# Altium PCB Copy of PCB1.PcbDoc
Units mm, origin at the board's own origin, x right, y up, seen from the top; angles counter-clockwise.
Board outline 91.9 x 76.4 mm, 2 copper layers (Top Layer, Bottom Layer), stack 0.211 mm thick; 44 components, 65 nets, 251 pads, 110 vias.
Unrouted connection lines stored in the file: 3.
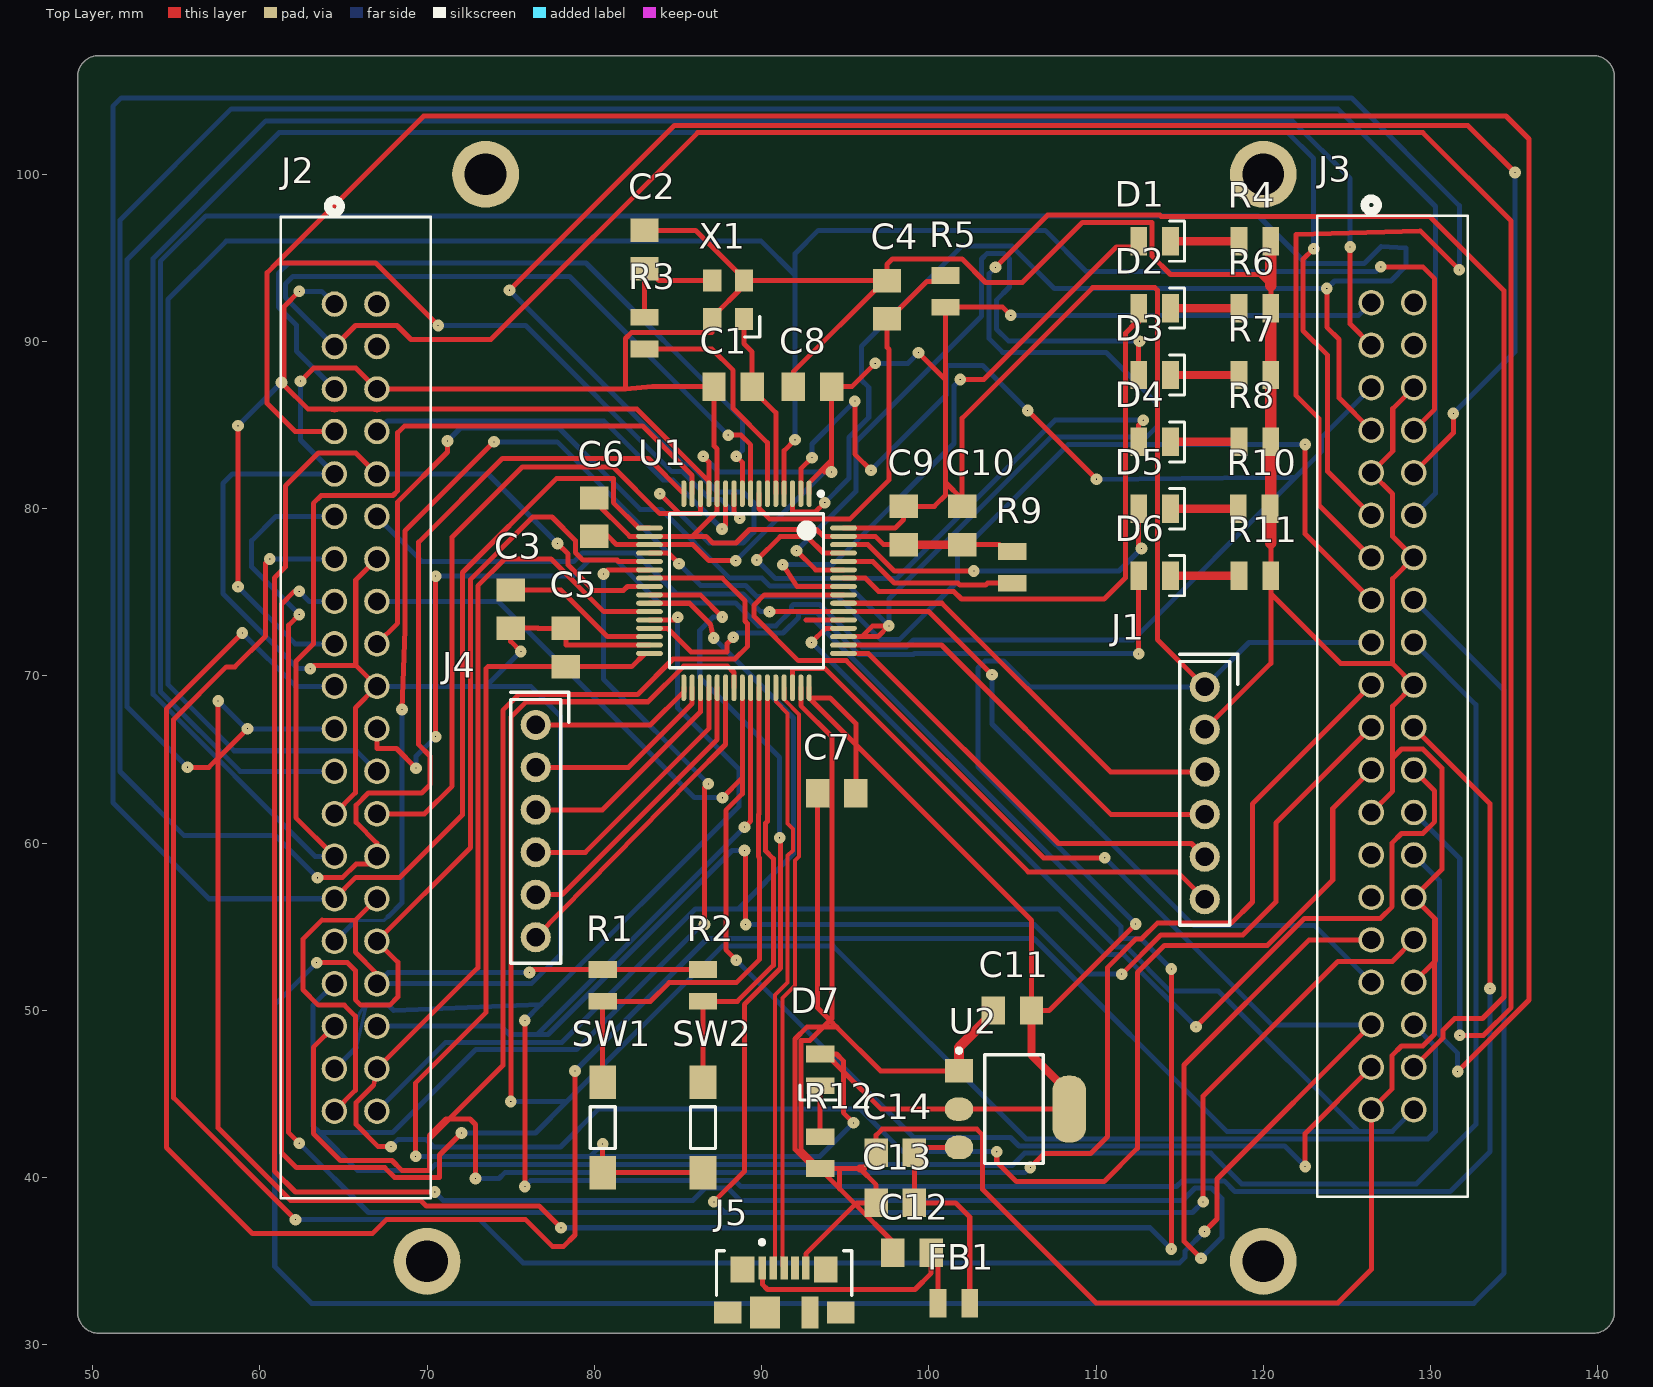
[diagram p0: Top Layer view]
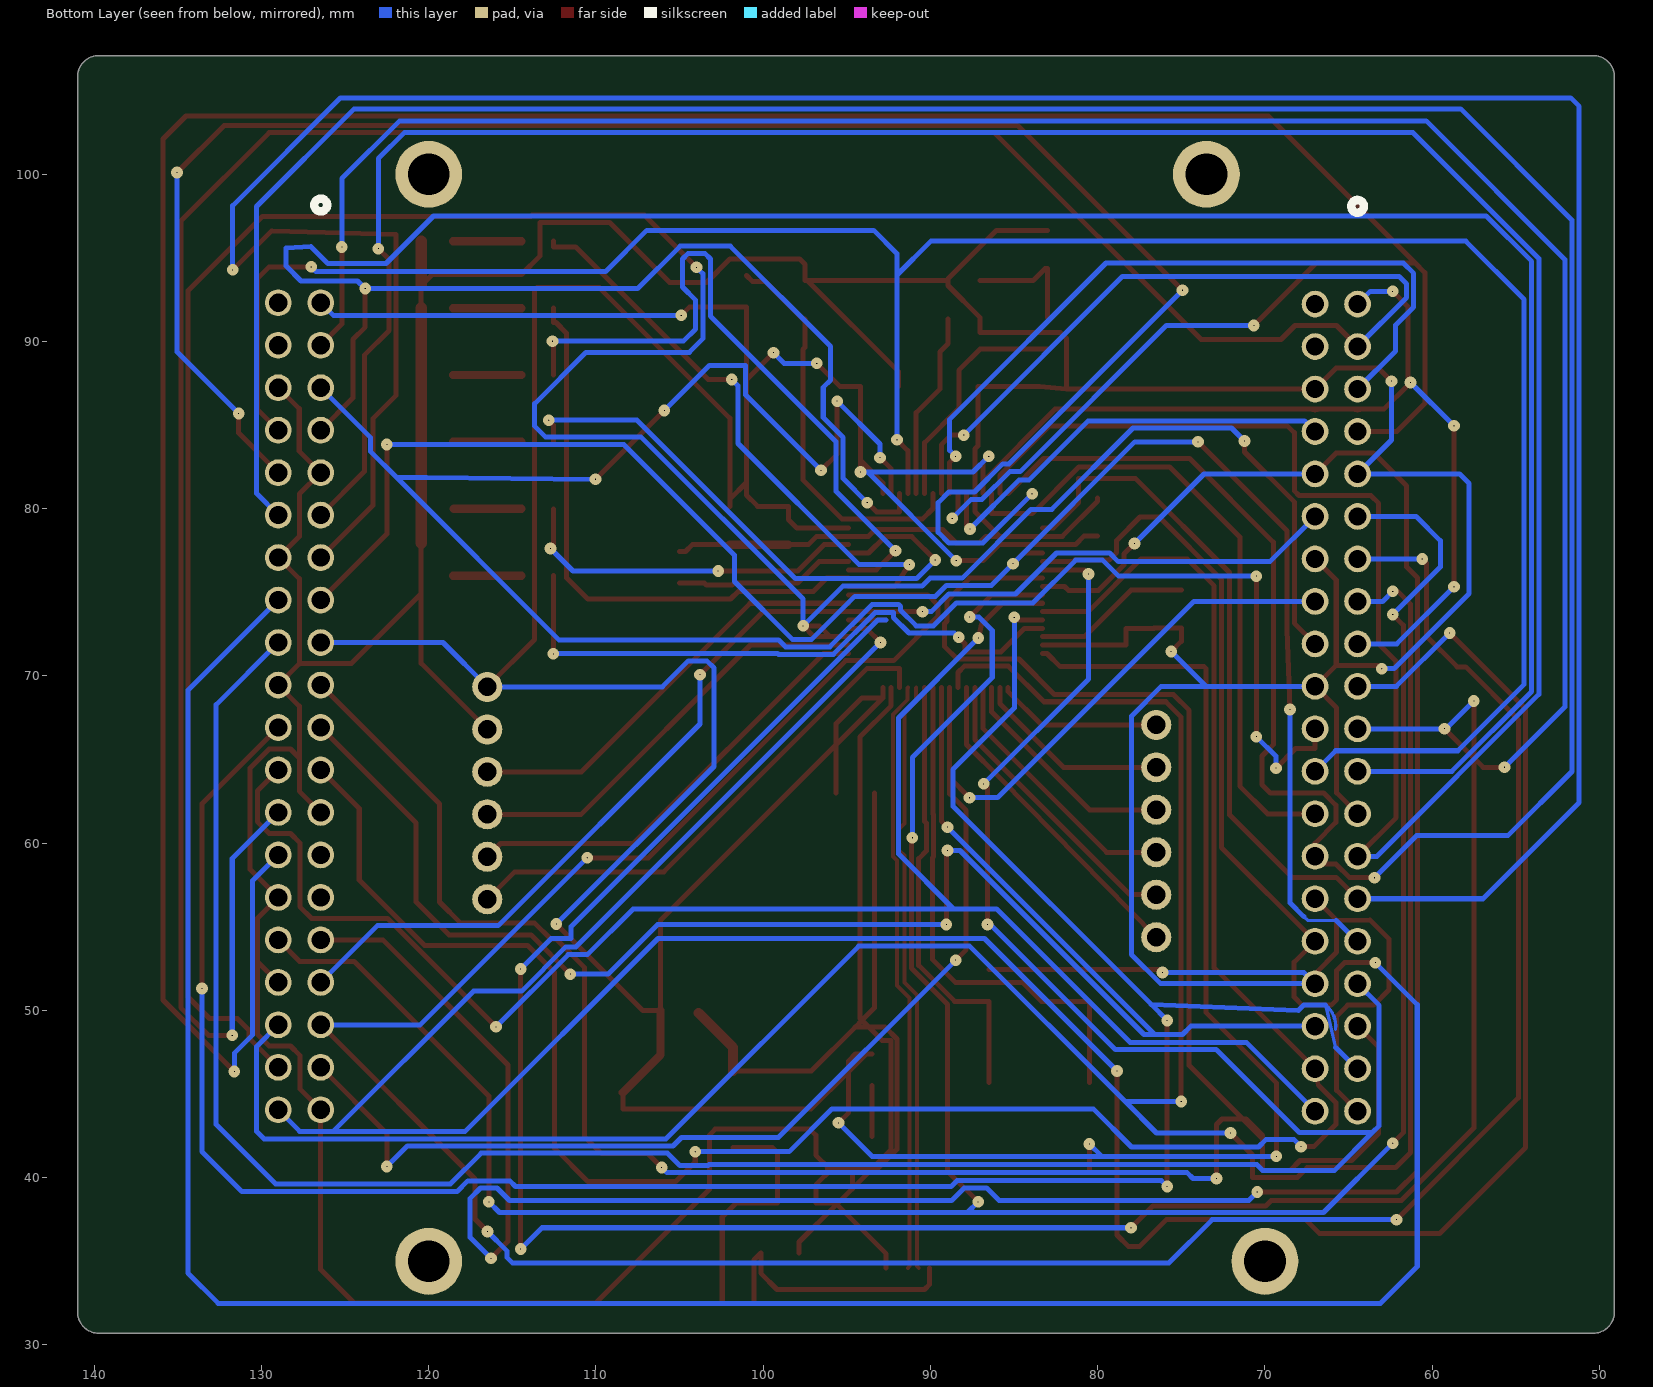
[diagram p1: Bottom Layer view, seen from below]

## Layer stack, top to bottom
Top Solder: solder mask 0.0102, Solder Resist, Dk 3.5
Top Layer: signal copper 0.0356
Dielectric 1: core 0.1397, Core-017, Dk 4.1
Bottom Layer: signal copper 0.0356
Bottom Solder: solder mask 0.0102, Solder Resist, Dk 3.5

## Board outline
49.1,31.97 49.1,105.83 cw(c50.37,105.83) 50.37,107.1 139.73,107.1 cw(c139.73,105.83) 141,105.83 141,31.97 cw(c139.73,31.97) 139.73,30.7 50.37,30.7 cw(c50.37,31.97)

## Design rules (kind name [scope] priority, off if disabled: settings)
Clearance [All] p1: gap=0.254 ignorepadtopadclearanceinfootprint=FALSE except(0: Arc-Hole Track-Hole SMDPad-Hole THPad-Hole Via-Hole Fill-Hole Poly-Hole Region-Hole Text-Hole; 0.127: Arc-Arc Arc-Track Arc-SMDPad Track-Track Track-SMDPad SMDPad-SMDPad; 0.33: Arc-THPad Arc-Via Track-THPad Track-Via SMDPad-THPad SMDPad-Via THPad-Via Via-Via; 0.5: THPad-THPad)
DiffPairsRouting [All] p1: maxlimit=0.2 minlimit=0.2 mostfreqgap=0.2 toplayer_minwidth=0.235 toplayer_maxwidth=0.235 toplayer_prefwidth=0.235 bottomlayer_minwidth=0.235 bottomlayer_maxwidth=0.235 bottomlayer_prefwidth=0.235 impedanceprofiledriven=TRUE impedanceprofileid={3DAFF3E0-E45B-4C19-A753-60FD53768F31} impedanceprofilevalue=90.000000 maxuncoupledlength=12.7
HoleSize [IsVia] p1: absolutevalues=TRUE maxlimit=2.54 minlimit=0 maxpercent=80.000 minpercent=20.000
PolygonConnect [All] p1: connectstyle=Direct reliefconductorwidth=0.254 reliefentries=4 polygonreliefangle="90 Angle" airgapwidth=0.254
RoutingVias [All] p1: holewidth=0 width=0.7 viastyle="Through Hole" minholewidth=0 minwidth=0.55 maxholewidth=0.4 maxwidth=0.9
SolderMaskExpansion [All] p1: expansion=0.102 istentingtop=FALSE
UnRoutedNet [All] p1: checkbadconnections=TRUE
Width [All] p1: maxlimit=1 minlimit=0.13 preferedwidth=0.3 minimp=50.000000 maximp=50.000000 favimp=50.000000
27 further rules are at their usual default settings.

## Classes and differential pairs
differential pair USB_D: +USB_D_P -USB_D_N

## Components (designator, comment, footprint, x,y, rotation, side; value= is the part's Value field where it differs from the comment)
C1 "28pF" CAP_0805 88.3,87.3 r180 top
C2 "28pF" CAP_0805 83,95.5 r90 top
C3 "2.2uF" CAP_0805 75,74 r90 top
C4 "100nF" CAP_0805 97.5,92.5 r270 top
C5 "100nF" CAP_0805 78.3,71.7 r270 top
C6 "100nF" CAP_0805 80,79.5 r270 top
C7 "100nF" CAP_0805 94.5,63 r0 top
C8 "100nF" CAP_0805 93.043,87.3 r0 top
C9 "100nF" CAP_0805 98.5,79 r90 top
C10 "2.2uF" CAP_0805 102,79 r90 top
C11 "22uF" CAP_0805 105,50 r0 top
C12 "2.2uF" CAP_0805 99,35.5 r0 top
C13 "2.2uF" CAP_0805 98,38.5 r0 top
C14 "22uF" CAP_0805 98,41.5 r0 top
D1 "GREEN" LED_0805_GREEN 113.5,96 r180 top
D2 "GREEN" LED_0805_GREEN 113.5,92 r180 top
D3 "GREEN" LED_0805_GREEN 113.5,88 r180 top
D4 "GREEN" LED_0805_GREEN 113.5,84 r180 top
D5 "GREEN" LED_0805_GREEN 113.5,80 r180 top
D6 "GREEN" LED_0805_GREEN 113.5,76 r180 top
D7 "GREEN" LED_0805_GREEN 93.5,46.45 r90 top
FB1 "120R" FB_0805 101.5,32.5 r0 top
J1 "G800W302018EU" G800W302018EU 116.5,63 r0 top
J2 "BUFFER_LOW" CONN_3020-40-0100-00_CNC 64.46,92.24 r270 top
J3 "BUFFER_HIGH" CONN_3020-40-0100-00_CNC 126.46,92.32 r270 top
J4 "G800W302018EU" G800W302018EU 76.5,60.73 r0 top
J5 "473460001" FP-473460001-MFG 91.35,32.29 r0 top
R1 "10k" RES_0805 80.5,51.5 r270 top
R2 "10k" RES_0805 86.5,51.5 r270 top
R3 "0R" RES_0805 83,90.5 r90 top
R4 "1k" RES_0805 119.5,96 r180 top
R5 "10k" RES_0805 101,93 r270 top
R6 "1k" RES_0805 119.5,92 r180 top
R7 "1k" RES_0805 119.5,88 r180 top
R8 "1k" RES_0805 119.5,84 r180 top
R9 "10k" RES_0805 105,76.5 r270 top
R10 "1k" RES_0805 119.45,80 r180 top
R11 "1k" RES_0805 119.5,76 r180 top
R12 "1k" RES_0805 93.5,41.5 r90 top
SW1 "DTSM-3" DTSM-3 80.5,43 r270 top
SW2 "DTSM-3" DTSM-3 86.5,43 r270 top
U1 "STM32F401RBT6TR" STM-LQFP64_L 89.1,75.1 r270 top
U2 "AMS1117-3.3" FP-AMS1117-IPC_C 105.1,44.1 r0 top
X1 "24MHz" XTAL_3225 88,92.5 r90 top

## Footprints (in the part's own frame and the unit in brackets; to place one, negate y for a bottom-side part, rotate by r counter-clockwise, add the part's x,y. Pads: shape width x height; smd on the part's side, far side on the other; paste and mask are expansions set on the pad)
CAP_0805 [mm]
  rect 1.4x1.7 smd: 1(-1.143,0) 2(1.143,0)
  body extent -1.15,-0.76 1.15,0.79, height 1.01
CONN_3020-40-0100-00_CNC [mil]
  round 60 / inner round 60 / far side round 63 hole 43 paste-31.5 mask-31.5: 1(0,0) 2(0,100) 3(100,0) 4(100,100) 5(200,0) 6(200,100) 7(300,0) 8(300,100) 9(400,0) 10(400,100) 11(500,0) 12(500,100) 13(600,0) 14(600,100) 15(700,0) 16(700,100) 17(800,0) 18(800,100) 19(900,0) 20(900,100) 21(1000,0) 22(1000,100) 23(1100,0) 24(1100,100) 25(1200,0) 26(1200,100) 27(1300,0) 28(1300,100) 29(1400,0) 30(1400,100) 31(1500,0) 32(1500,100) 33(1600,0) 34(1600,100) 35(1700,0) 36(1700,100) 37(1800,0) 38(1800,100) 39(1900,0) 40(1900,100)
  silkscreen extent -245,-127 2105,227
DTSM-3 [mm]
  rect 2x1.6 smd: 1(-2.7,0) 2(2.7,0)
  silkscreen extent -1.25,-0.75 1.25,0.75, body extent -3.6,-1.75 3.6,1.75, height 4.96
FB_0805 [mm]
  rect 1x1.7 smd: 1(-0.95,0) 2(0.95,0)
  body extent -1,-0.63 1,0.63, height 0.86
FP-473460001-MFG [mm]
  rect 0.45x1.38 smd paste+0 mask+0: 1(-1.3,2.31) 2(-0.65,2.31) 3(0,2.31) 4(0.65,2.31) 5(1.3,2.31)
  rect 1.425x1.55 smd paste+0 mask+0: 6(-2.487,2.225) 7(2.488,2.225)
  rect 1.65x1.3 smd paste+0 mask+0: 8(-3.375,-0.35) 11(3.375,-0.35)
  rect 1.8x1.9 smd paste+0 mask+0: 9(-1.15,-0.35)
  rect 1x1.9 smd paste+0 mask+0: 10(1.55,-0.35)
  silkscreen extent -4.05,0.67 4.04,3.97, body extent -4.3,-2.48 4.3,3.45, height 0.25
FP-AMS1117-IPC_C [mm]
  rect 1.7x1.4 smd paste+0 mask+0: 1(-3.295,2.29)
  rrect100% 1.7x1.4 smd paste+0 mask+0: 2(-3.295,0) 3(-3.295,-2.29)
  rrect87% 2.004x4 smd paste+0 mask+0: 4(3.295,0)
  silkscreen extent -3.42,-3.25 1.75,3.62, body extent -3.9,-3.35 3.9,3.35, height 0.25
G800W302018EU [mm]
  round 1.8 hole 1.1 mask+0.07: 1(0,6.35) 2(0,3.81) 3(0,1.27) 4(0,-1.27) 5(0,-3.81) 6(0,-6.35)
  silkscreen extent -1.5,-7.9 1.97,8.3, body extent -1.25,-7.62 1.25,7.62, height 8.61
LED_0805_GREEN [mm]
  rect 1x1.7 smd: A(0.95,0) K(-0.95,0)
  silkscreen extent -1.8,-1.2 -0.9,1.2, body extent -1,-0.63 1,0.63, height 1.12
RES_0805 [mm]
  rect 1x1.7 smd: 1(-0.95,0) 2(0.95,0)
  body extent -1,-0.63 1,0.63, height 0.47
STM-LQFP64_L [mm] "QFP, 64-Leads, Body 10x10mm, Pitch 0.5mm, IPC High Density"
  oval 1.6x0.3 smd: 1(-5.8,3.75) 2(-5.8,3.25) 3(-5.8,2.75) 4(-5.8,2.25) 5(-5.8,1.75) 6(-5.8,1.25) 7(-5.8,0.75) 8(-5.8,0.25) 9(-5.8,-0.25) 10(-5.8,-0.75) 11(-5.8,-1.25) 12(-5.8,-1.75) 13(-5.8,-2.25) 14(-5.8,-2.75) 15(-5.8,-3.25) 16(-5.8,-3.75) 33(5.8,-3.75) 34(5.8,-3.25) 35(5.8,-2.75) 36(5.8,-2.25) 37(5.8,-1.75) 38(5.8,-1.25) 39(5.8,-0.75) 40(5.8,-0.25) 41(5.8,0.25) 42(5.8,0.75) 43(5.8,1.25) 44(5.8,1.75) 45(5.8,2.25) 46(5.8,2.75) 47(5.8,3.25) 48(5.8,3.75)
  oval 0.3x1.6 smd: 17(-3.75,-5.8) 18(-3.25,-5.8) 19(-2.75,-5.8) 20(-2.25,-5.8) 21(-1.75,-5.8) 22(-1.25,-5.8) 23(-0.75,-5.8) 24(-0.25,-5.8) 25(0.25,-5.8) 26(0.75,-5.8) 27(1.25,-5.8) 28(1.75,-5.8) 29(2.25,-5.8) 30(2.75,-5.8) 31(3.25,-5.8) 32(3.75,-5.8) 49(3.75,5.8) 50(3.25,5.8) 51(2.75,5.8) 52(2.25,5.8) 53(1.75,5.8) 54(1.25,5.8) 55(0.75,5.8) 56(0.25,5.8) 57(-0.25,5.8) 58(-0.75,5.8) 59(-1.25,5.8) 60(-1.75,5.8) 61(-2.25,5.8) 62(-2.75,5.8) 63(-3.25,5.8) 64(-3.75,5.8)
  silkscreen extent -5.92,-4.6 4.6,4.6, body extent -5,-5 5,5, height 1.6
XTAL_3225 [mm]
  rect 1.3x1.1 smd: 1(-1.15,-0.95) 2(1.15,-0.95) 3(1.15,0.95) 4(-1.15,0.95)
  silkscreen extent -2.23,-1.89 -1,-1, body extent -1.6,-1.28 1.6,1.22, height 0.61

## Part data
C1 C2 C3 C4 C5 C6 C7 C8 C9 C10 C11 C12 C13 C14: library part CAP_0805_16V, "Capacitor SMD 0805 16V"
D1 D2 D3 D4 D5 D6 D7: library part LED_0805_GREEN, "LED 0805 GREEN SMD"
FB1: library part FB_0805, "Ferrite Bead SMD 0805"
J1 J4: "Pin Header 6 Position 2.54mm Pitch", Manufacturer=Amphenol, Manufacturer Part Number=G800W302018EU
J2 J3: library part 3020-40-0100-00, "No Description Available", Mfr_Name="CNC Tech", RefDes=RefDes, Type=Type
J5: library part CMP-2000-05246-2, "CONN RCPT USB2.0 MICRO B SMD R/A", Current Rating=1.8A, Manufacturer=Molex, Package=0, Temperature="-30°C to +85°C", Temperature Range High=+85°C, Temperature Range Low=-30°C, Voltage Rating=30V, Automotive=No, Category=Conn, ComponentLink2Description=Datasheet, ComponentLink2URL=https://www.molex.com/webdocs/datasheets/pdf/en-us/0473460001_IO_CONNECTORS.pdf, Conn Orientation="Right Angle", Contact Material=Gold,Nickel, Device Class L1=Connectors, Device Class L2="USB Connectors", Device Class L3=unset, Digikey Description="CONN RCPT USB2.0 MICRO B SMD R/A", Footprint Url=https://www.molex.com/pdm_docs/sd/473460001_sd.pdf, Height=2.945mm, Is Female=yes, Lead Free=Yes, Manufacturer Part Number=473460001, Number Of Contacts=5, Octopart=https://octopart.com/47346-0001-molex-7164928, Pitch=0.65mm, RoHS=TRUE, Shielding=true, Usb Standard="USB 2.0"
R1 R2 R3 R4 R5 R6 R7 R8 R9 R10 R11 R12: library part RES_0805, "Resistor SMD 0805"
SW1 SW2: "Tactile Switch SMD SPST", Manufacturer=Diptronics, Manufacturer Part Number=DTSM-3
U1: library part CMP-0243-00143-1, "ARM Cortex-M4 32-bit MCU+FPU, 128 KB Flash, 64 KB Internal RAM, 50 I/Os, 64-Pin LQFP, -40 to 85 degC, Tape and Reel", I/Os (High Current)=50, Operating Frequency(F) (Processor speed) (MHz)=84, Package Description=LQFP64, Package Reference="64-Pin Low-profile Quad Flat Package, Body 10 x 10 mm, Pitch 0.5 mm", Supply Voltage(Vcc) min (V)=1.7, ComponentLink1Description="Manufacturer URL", ComponentLink1URL=http://www.st.com/, ComponentLink2Description=Datasheet, ComponentLink2URL=http://www.st.com/st-web-ui/static/active/en/resource/technical/document/datasheet/DM00086815.pdf, Core="ARM Cortex-M4", DatasheetVersion="Rev. 5", FLASH Size (Prog) (kB)=128, Internal RAM Size (kB)=64, Mounting Technology="Surface Mount", Packing="Tape and Reel"
U2: library part CMP-209535-000001-1, "LDO Voltage Regulators 1A, 3.3V", Dropout Voltage=1.1V, Manufacturer="Advanced Monolithic Systems", Max Junction Temp=+125°C, Max Power Dissipation=1.2W, Max Supply Voltage=15V, Nominal Supply Current=5mA, Output Current=1A, Output Voltage=3.3V, Package=AMS1117, Temperature="-40°C to +125°C", Temperature Range Low=-40°C, Automotive=No, Category=IC, ComponentLink2Description=Datasheet, ComponentLink2URL=http://www.advanced-monolithic.com/pdf/ds1117.pdf, Device Class L1="Integrated Circuits (ICs)", Device Class L2="Power Management ICs", Device Class L3="Voltage Regulators - Linear", Height=1.8mm, Ipc Land Pattern Name=SOT229P700X180-4, Lead Free=Yes, Manufacturer Part Number=AMS1117-3.3, Number Of Outputs=1, Octopart=https://octopart.com/ams1117-3.3-advanced+monolithic+systems-25899300, Output Type=Fixed, RoHS=TRUE, Standoff Height=0.64mm, Temperature Range High=+125°C
X1: library part TSX-3225_24.0000MF15X-AC, "Crystal SMD 24MHz 10PPM 7pF 3225", Manufacturer=Epson, Manufacturer Part Number="TSX-3225 24.0000MF15X-AC"

## Free pads (board coordinates)
  round 4 hole 2.5: 1(70,35) 1(73.5,100) 1(120,35) 1(120,100)

## Via types
v1: diameter 0.7, hole 0, Top Layer to Bottom Layer, 110 vias

## Nets (pads, with @x,y where several pads share a name; then routed paths per layer and width w, separated by ;. In a path a pad name is that pad's centre, name@x,y a point inside that pad or via, vN(x,y) a via of type N, cw(c..) or ccw(c..) an arc to the next point about the centre after c; other vN are vias at no path point)
3V3: C5.2 C6.2 C7.2 C8.2 C9.2 C10.2 C11.2 D7.A J1.1 J2.1 J2.17 J3.1 J3.17 R5.2 SW1.2 SW2.2 U1.1 U1.13 U1.19 U1.32 U1.48 U1.64 U2.2 U2.4 | length 389.3
  Top Layer w0.3: v1(58.699,75.336) v1(58.699,84.963) ; v1(61.29,87.554) v1@61.45,87.394 ; v1(62.365,93) 61.45,92.085 v1@61.45,87.394 ; v1(69.317,41.275) 69.317,45.669 73.533,49.886 73.533,70.455 73.635,70.557 C5.2 82.233,70.557 83.026,71.35 U1.32 ; C6.2 80.825,78.357 81.332,77.85 U1.19 85.903,77.85 86.854,76.898 v1(88.456,76.898) ; v1(80.5,42.012) SW1.2 SW2.2 ; v1(86.512,83.134) 86.85,82.797 U1.13@86.85,81.654 ; U1.13 U1.13@86.85,81.654 ; U1.48 U1.48@92.85,68.685 ; U1.1 92.85,81.55 94.186,82.886 ; D7.A D7.A@93.85,47.4 ; 93.751,82.194 v1(94.186,82.194) 94.186,82.886 ; U1.64 97.989,78.85 98.5,79.361 C9.2 100.33,80.143 101,80.813 101,81.569 ; v1(95.504,43.282) 94.894,43.891 94.894,46.356 ; C7.2 95.643,65.892 ; v1(96.799,88.697) 95.403,87.3 C8.2 94.186,82.886 ; v1(99.39,89.332) 100.99,87.732 100.99,81.578 101,81.569 ; C10.2 C10.2@102,80.569 ; v1(104.902,91.567) 104.419,92.05 R5.2 101,81.569 ; U2.4@108.395,45.098 U2.4 U2.2 97.15,44.1 94.894,46.356 ; v1(112.37,55.169) 107.201,50 C11.2 106.143,55.392 95.643,65.892 ; J1.1 113.665,72.185 113.665,93.066 113.513,93.218 109.798,93.218 102,85.42 C10.2@102,80.569 ; v1@61.45,87.394 62.889,85.955 64.159,85.955 ; 64.159,85.955 ccw(c64.46,87.16) 64.761,85.955 ; 64.159,85.955 64.761,85.955 ; 64.761,85.955 66.699,85.955 ; 66.699,85.955 ccw(c67,87.16) 67.301,85.955 ; 66.699,85.955 67.301,85.955 ; 67.301,85.955 82.549,85.955 U1.13@86.85,81.654 ; U1.48@92.85,68.685 92.85,68.682 U1.48@92.853,68.682 ; U1.48@92.85,68.685 U1.48@92.853,68.682 ; U1.48@92.853,68.682 94.107,68.682 95.643,67.146 95.643,65.892 ; U1.48@92.853,68.682 95.643,65.892 ; D7.A@93.85,47.4 94.484,47.4 94.894,46.99 94.894,46.356 ; D7.A@93.85,47.4 94.894,46.356 ; 101,81.569 C10.2@102,80.569
  Top Layer w0.5: C11.2 106.143,47.35 U2.4@108.395,45.098
  Bottom Layer w0.3: v1(58.699,75.336) 62.116,71.92 J2.17 ; v1(58.699,84.963) v1(61.29,87.554) ; v1(62.365,93) 63.7,93 J2.1 ; v1(69.317,41.275) 79.763,41.275 ; v1(80.5,42.012) 79.763,41.275 ; v1(86.512,83.134) 87.452,82.194 93.751,82.194 ; v1(88.456,76.898) 93.751,82.194 ; v1(94.186,82.194) 93.751,82.194 ; v1(95.504,43.282) 93.497,41.275 79.763,41.275 ; v1(96.799,88.697) 98.755,88.697 v1(99.39,89.332) ; v1(104.902,91.567) 125.707,91.567 J3.1 ; v1(112.37,55.169) 102.946,64.592 102.946,70.485 103.37,70.909 104.478,70.909 106.037,69.35 J1.1 119.15,72 J3.17
5V: C13.2 C14.2 FB1.2 U2.3 | length 14.6
  Top Layer w0.3: U2.3 99.453,41.81 C14.2 C13.2 101.6,38.5 102.45,37.65 FB1.2
GND: C1.2 C2.2 C3.1 C4.1 C5.1 C6.1 C7.1 C8.1 C9.1 C10.1 C11.1 C12.1 C13.1 C14.1 J1.2 J2.6 J2.9 J2.14 J2.20 J2.25 J2.30 J2.34 J2.39 J3.6 J3.9 J3.14 J3.20 J3.25 J3.30 J3.34 J3.39 J5.5 R1.1 R2.1 R4.1 R6.1 R7.1 R8.1 R9.1 R10.1 R11.1 R12.1 U1.12 U1.18 U1.31 U1.47 U1.63 U2.1 X1.2 X1.4 | length 510.5
  Top Layer w0.3: v1(62.433,87.63) 63.221,88.417 65.743,88.417 J2.6 81.864,87.16 ; v1(63.017,70.434) 63.221,70.637 65.743,70.637 ; J2.39 65.71,45.23 65.71,49.657 65.049,50.317 63.5,50.317 62.568,51.249 62.568,54.263 63.703,55.397 65.71,55.39 ; J2.25 65.71,63.01 65.71,68.09 J2.20 65.743,70.637 ; J2.34 67,52.202 65.71,53.492 65.71,55.39 ; J2.30 65.71,55.39 ; J2.14 65.735,75.735 65.735,70.645 65.743,70.637 ; v1(75.606,71.466) 75,72.072 C3.1 76.632,72.857 76.646,72.843 C5.1 78.3,71.85 U1.31 ; v1(76.124,52.273) 76.301,52.45 R1.1 R2.1 ; C6.1 80,80.467 82.117,78.35 U1.18 85.868,78.35 ; C2.2 86.057,96.643 88.95,93.75 X1.2 X1.2@88.95,93.643 ; C8.1 91.9,88.193 C4.1@97.35,93.643 ; U1.47 92.35,68.224 94.209,66.366 94.209,49.53 94.089,49.411 ; J5.5 92.65,35.449 95.606,38.405 ; C7.1 93.357,50.143 94.089,49.411 ; 96.057,40.55 96.857,41.35 C14.1 96.857,42.545 97.213,42.901 102.87,42.901 103.226,42.545 103.226,39.294 110.007,32.512 124.46,32.512 126.46,34.512 J3.39 127.711,45.311 127.711,47.32 128.27,47.879 129.54,47.879 130.242,48.581 130.242,52.922 ; C12.1 97.857,36.153 95.606,38.405 ; C9.1 97.3,77.857 96.807,78.35 U1.63 93.701,78.35 93.285,78.765 89.281,78.765 88.468,77.953 87.088,77.953 86.69,78.35 85.868,78.35 ; U2.1 97.11,46.39 94.5,49 ; C10.1 104.243,77.857 104.65,77.45 R9.1 ; C11.1@103.857,49.85 C11.1 ; J1.2 120.45,70.76 120.45,74.93 ; R10.1 120.4,78.003 120.45,77.953 R11.1 120.45,74.93 ; R6.1 120.45,93.345 119.79,94.005 114.452,94.005 113.335,95.123 113.335,97.127 109.192,97.127 105.596,93.531 103.395,93.531 101.981,94.945 97.83,94.945 97.5,94.615 C4.1 C4.1@97.35,93.643 ; J3.25 127.737,63.117 127.737,65.1 ; J3.34 130.242,52.922 ; J3.6 127.743,85.983 127.743,83.443 J3.9 127.737,80.883 127.737,78.343 J3.14 127.737,75.817 127.737,70.723 ; 81.864,87.16 83.49,87.3 C1.2 87.157,83.763 87.35,83.57 U1.12 87.35,79.832 85.868,78.35 ; 81.864,87.16 81.864,90.183 82.233,90.551 87.05,90.551 X1.4 87.05,91.45 88.95,93.35 X1.2@88.95,93.643 ; X1.2@88.95,93.643 C4.1@97.35,93.643 ; R12.1@93.46,40.55 R12.1 94.673,40.55 ; R12.1@93.46,40.55 93.15,40.55 92,41.7 92,48.29 92.71,49 93.679,49 ; R12.1@93.46,40.55 93.48,40.53 94.673,39.338 ; R12.1@93.46,40.55 92.354,41.656 92.354,48.209 92.888,48.209 93.679,49 ; 93.679,49 94.5,49 ; 93.679,49 94.089,49.411 ; 94.089,49.411 94.5,49 ; 94.673,39.338 95.606,38.405 ; 94.673,39.338 94.673,40.55 ; 94.673,40.55 95.885,40.55 96.857,39.578 C13.1 95.701,38.5 95.606,38.405 ; 120.45,74.93 124.631,70.749 127.711,70.749 127.737,70.723 ; 127.737,65.1 127.737,68.197 J3.20 127.737,70.723 ; 127.737,65.1 128.27,65.634 129.54,65.634 130.683,64.491 130.683,58.443 J3.30 130.242,55.518 ; 130.242,52.922 130.302,52.982 130.302,55.458 130.242,55.518 ; 130.242,52.922 130.242,55.518
  Top Layer w0.5: 95.885,40.55 96.057,40.55 ; C9.1 C10.1
  Top Layer w0.6: U2.1 101.805,47.798 C11.1@103.857,49.85
  Top Layer w0.7: 120.45,77.953 R8.1 R7.1 R6.1 ; 120.45,93.345 R4.1
  Bottom Layer w0.3: v1(62.433,87.63) 62.433,84.107 J2.9 58.356,82.08 57.79,81.513 57.79,74.93 62.285,70.434 v1(63.017,70.434) ; J2.20 73.52,69.38 ; v1(75.606,71.466) 73.52,69.38 ; v1(76.124,52.273) 67.673,52.273 J2.34 76.238,51.6 77.978,53.34 77.978,67.602 76.2,69.38 73.52,69.38
GPIO_3: J2.3 J3.26 U1.8 | length 183.9
  Top Layer w0.3: J2.3 65.717,90.957 68.199,90.957 69.037,90.119 73.812,90.119 86.182,102.489 129.54,102.489 134.823,97.206 134.823,50.165 133.172,48.514 v1(131.75,48.514) ; v1(88.011,84.404) 88.766,84.404 89.35,83.82 U1.8
  Bottom Layer w0.3: J2.3 61.535,92.625 61.535,93.453 61.978,93.896 78.52,93.896 v1(88.011,84.404) ; J3.26 131.75,59.09 v1(131.75,48.514)
GPIO_5: J2.5 J3.27 U1.9 | length 44.9
  Top Layer w0.3: v1(88.494,83.134) 88.85,82.778 U1.9
  Bottom Layer w0.3: J2.5 62.183,89.438 62.183,90.992 61.108,92.067 61.108,94.077 61.722,94.691 79.502,94.691 88.849,85.344 88.849,83.49 v1(88.494,83.134)
GPIO_7: J2.7 J3.28 U1.10 | length 199.6
  Top Layer w0.3: J2.7 62.116,84.62 60.439,86.297 60.439,94.119 61.011,94.691 ; v1(70.663,90.957) 66.929,94.691 61.011,94.691 ; U1.10 88.35,79.773 v1(88.697,79.426) ; v1(131.623,46.355) 135.89,50.622 135.89,102.108 134.518,103.48 69.799,103.48 61.011,94.691
  Bottom Layer w0.3: v1(70.663,90.957) 75.895,90.957 84.633,82.22 85.255,82.22 86.915,80.56 87.562,80.56 v1(88.697,79.426) ; J3.28 130.531,57.769 130.531,48.539 131.623,47.447 v1(131.623,46.355)
GPIO_8: J2.8 J3.29 U1.11 | length 25.8
  Top Layer w0.3: v1(87.63,78.791) 87.85,79.011 U1.11
  Bottom Layer w0.3: J2.8 67.637,85.257 80.567,85.257 84.118,81.705 84.716,81.705 v1(87.63,78.791)
GPIO_10: J2.10 J3.31 U1.24 | length 156.7
  Top Layer w0.3: J2.10 65.743,83.337 63.5,83.337 61.527,81.364 61.527,76.517 60.869,75.859 60.869,40.401 62.129,39.141 v1(70.46,39.141) ; v1(77.8,77.927) 78.435,77.292 78.435,76.632 79.959,75.108 81.737,75.108 81.979,75.35 U1.24 ; v1(116.281,35.179) 115.265,36.195 115.265,46.736 122.749,54.22 J3.31
  Bottom Layer w0.3: J2.10 73.647,82.08 v1(77.8,77.927) ; v1(70.46,39.141) 70.959,38.642 85.891,38.642 86.637,39.387 87.987,39.387 88.733,38.642 115.167,38.642 115.913,39.387 116.903,39.387 117.526,38.765 117.526,36.424 v1(116.281,35.179)
GPIO_11: J2.11 J3.32 U1.25 | length 167.4
  Top Layer w0.3: v1(62.357,42.062) 61.723,42.697 61.723,73.039 v1(62.357,73.673) ; U1.25 86.338,74.85 v1(87.655,73.533) ; v1(87.147,38.557) 88.976,40.386 88.976,50.368 91.135,52.527 91.135,60.274 v1(91.084,60.325) ; v1(116.408,38.557) 116.408,44.882 124.46,52.934 127.714,52.934 J3.32
  Bottom Layer w0.3: v1(62.357,42.062) 66.497,37.922 87.782,37.922 ; v1(62.357,73.673) 59.512,76.517 59.512,78.092 60.96,79.54 J2.11 ; v1(87.147,38.557) 87.782,37.922 ; v1(87.655,73.533) 87.112,73.533 86.305,72.726 86.305,69.905 91.084,65.126 v1(91.084,60.325) ; v1(116.408,38.557) 115.773,37.922 87.782,37.922
GPIO_12: J2.12 J3.33 U1.54 | length 73.2
  Top Layer w0.3: v1(90.471,73.85) U1.54 100.013,73.85 v1(103.784,70.079)
  Bottom Layer w0.3: J2.12 69.705,76.835 78.766,76.835 79.286,77.355 82.463,77.355 84.918,74.9 88.9,74.9 89.951,73.85 v1(90.471,73.85) ; v1(103.784,70.079) 103.784,67.132 115.849,55.067 123.073,55.067 J3.33
GPIO_13: J2.13 J3.35 U1.56 | length 175.3
  Top Layer w0.3: v1(60.591,77) 60.35,76.759 60.35,72.39 58.504,70.544 57.996,70.544 54.847,67.394 54.847,44.772 v1(62.128,37.49) ; U1.56 90.17,74.85 89.547,74.227 89.547,73.571 92.201,70.917 95.072,70.917 106.858,59.131 v1(110.524,59.131) ; v1(116.484,36.779) 117.238,37.533 117.238,39.918 J3.35
  Bottom Layer w0.3: v1(60.591,77) J2.13 ; v1(62.128,37.49) 73.152,37.49 75.735,34.908 114.998,34.908 115.333,35.242 115.333,35.628 v1(116.484,36.779) ; v1(110.524,59.131) 120.515,49.14 J3.35
GPIO_15: J2.15 J3.36 U1.39 | length 166.5
  Top Layer w0.3: v1(62.357,75.063) 62.063,75.063 61.296,74.295 61.296,41.498 62.192,40.602 67.475,40.602 68.06,40.018 70.746,40.018 70.746,41.358 v1(72.06,42.672) ; v1(75.006,44.552) 75.006,67.539 75.928,68.46 83.215,68.46 85.34,70.584 87.975,70.584 88.35,70.21 U1.39
  Bottom Layer w0.3: v1(62.357,75.063) 62.96,74.46 J2.15 ; v1(72.06,42.672) 76.479,42.672 78.359,44.552 ; v1(75.006,44.552) 78.359,44.552 ; J3.36 130.302,47.838 130.302,42.774 129.852,42.324 105.819,42.324 94.295,53.848 87.655,53.848 78.359,44.552
GPIO_16: J2.16 J3.37 U1.40 | length 90.9
  Top Layer w0.3: v1(87.66,62.721) 88.85,63.911 ; v1(88.494,53.01) 87.867,53.637 87.867,61.968 88.85,62.951 88.85,63.911 ; U1.40 88.85,63.911 ; v1(122.504,40.665) 122.504,42.644 J3.37
  Bottom Layer w0.3: J2.16 74.248,74.46 85.987,62.721 v1(87.66,62.721) ; v1(88.494,53.01) 99.097,42.407 104.882,42.407 105.398,41.891 121.278,41.891 v1(122.504,40.665)
GPIO_18: J2.18 J3.38 U1.51 | length 172.9
  Top Layer w0.3: J2.18 68.242,73.162 68.242,80.411 71.222,83.391 v1(71.222,84.049) ; U1.51 95.997,72.35 ; v1(103.988,94.437) 107.112,97.561 113.817,97.561 113.894,97.485 129.946,97.485 134.391,93.04 134.391,50.8 133.106,49.514 131.445,49.514 130.76,48.829 130.76,48.36 J3.38 ; 95.997,72.35 96.963,72.35 v1(97.612,73) 96.647,73 95.997,72.35
  Bottom Layer w0.3: v1(71.222,84.049) 72.003,84.83 77.883,84.83 82.745,79.969 83.99,79.969 88.106,75.852 90.026,75.852 90.508,75.37 95.242,75.37 v1(97.612,73) 97.612,74.6 107.315,84.303 113.03,84.303 113.665,84.938 113.665,86.284 110.592,89.357 104.419,89.357 103.607,90.17 103.607,94.056 v1(103.988,94.437)
GPIO_19: J2.19 J3.40 U1.52 | length 183
  Top Layer w0.3: v1(58.953,72.568) 54.42,68.034 54.42,41.795 59.563,36.652 66.726,36.652 67.564,37.49 75.895,37.49 77.508,35.877 78.143,35.877 78.842,36.576 v1(78.842,46.383) ; v1(92.989,72.009) 93.83,72.85 U1.52
  Bottom Layer w0.3: v1(58.953,72.568) 62.141,69.38 J2.19 ; v1(78.842,46.383) 86.765,54.306 106.291,54.306 117.824,42.774 125.705,42.774 ; v1(92.989,72.009) 111.195,53.803 111.799,53.803 114.447,51.156 117.323,51.156 125.705,42.774 ; J3.40 127.714,42.774 125.705,42.774
GPIO_21: J2.21 J3.3 U1.53 | length 268
  Top Layer w0.3: v1(55.677,64.541) 56.947,64.541 57.506,65.1 ; v1(57.506,68.504) 57.506,65.1 ; v1(59.258,66.853) 57.506,65.1 ; v1(78.003,37.008) 76.7,38.311 69.96,38.311 69.63,38.642 61.841,38.642 57.506,42.977 57.506,65.1 ; 92.65,73.35 U1.53 ; v1(114.503,35.738) v1(114.503,52.477) ; v1(125.197,95.656) 125.197,91.043 J3.3
  Bottom Layer w0.3: v1(55.677,64.541) 52.07,68.148 52.07,94.909 60.361,103.2 121.742,103.2 125.197,99.746 v1(125.197,95.656) ; v1(57.506,68.504) 59.169,66.84 v1@59.271,66.84 ; v1(59.258,66.853) v1@59.271,66.84 ; J2.21 v1@59.271,66.84 ; v1(78.003,37.008) 113.233,37.008 v1(114.503,35.738) ; 92.65,73.35 93.15,73.35 111.482,55.018 111.482,54.301 112.679,54.301 v1(114.503,52.477)
GPIO_22: J2.22 J3.5 U1.2 | length 125.8
  Top Layer w0.3: J2.22 67,65.659 68.174,65.659 v1(69.342,64.491) ; v1(70.51,66.37) v1(70.51,75.971) ; U1.2 92.35,82.393 v1(93.015,83.058) ; v1(95.58,86.436) 95.58,83.261 v1(96.545,82.296) ; v1(105.91,85.877) 105.918,85.877 v1(110.033,81.763)
  Bottom Layer w0.3: v1(69.342,64.491) 69.342,65.202 v1(70.51,66.37) ; v1(70.51,75.971) 78.748,75.971 79.705,76.928 81.314,76.928 83.871,74.371 88.443,74.371 89.814,73 90.856,73 91.796,73.94 91.796,74.164 91.912,74.28 93.481,74.28 96.019,71.743 98.667,71.743 99.085,72.161 112.217,72.161 121.92,81.864 ; v1(93.015,83.058) 93.015,83.871 v1(95.58,86.436) ; v1(96.545,82.296) 101.049,86.8 101.049,88.562 103.226,88.562 v1(105.91,85.877) ; v1(110.033,81.763) 120.142,81.864 121.92,81.864 ; J3.5 123.495,84.275 123.495,83.439 121.92,81.864
GPIO_23: J2.23 J3.7 U1.3 | length 176.5
  Top Layer w0.3: U1.3 91.85,79.807 93.218,79.807 v1(93.777,80.366) ; v1(123.8,93.167) 123.8,90.856 124.536,90.119 124.536,86.624 J3.7
  Bottom Layer w0.3: J2.23 58.826,64.3 54.051,69.075 54.051,94.793 56.769,97.511 119.71,97.511 122.555,94.666 126.035,94.666 127.051,95.682 128.524,95.606 128.524,94.513 127.635,93.624 124.257,93.624 v1(123.8,93.167) 107.505,93.167 104.97,95.703 101.972,95.703 95.969,89.701 95.969,87.702 96.41,87.261 96.41,85.455 95.216,84.261 95.216,81.805 v1(93.777,80.366)
GPIO_24: J2.24 J3.8 U1.4 | length 141.9
  Top Layer w0.3: U1.4 91.35,83.476 v1(91.999,84.125) ; v1(127.025,94.463) 129.54,94.463 130.251,93.751 130.251,85.951 J3.8
  Bottom Layer w0.3: J2.24 65.77,65.53 58.47,65.53 54.5,69.5 54.5,92.515 57.985,96 89.979,96 91.999,93.98 ; v1(91.999,84.125) 91.999,93.98 ; v1(127.025,94.463) 126.746,94.183 109.423,94.183 106.959,96.647 93.396,96.647 91.999,95.25 91.999,93.98
GPIO_26: J2.26 J3.10 U1.14 | length 155.3
  Top Layer w0.3: J2.26 69.85,61.76 71.501,63.411 71.501,78.308 75.692,82.499 81.128,82.499 83.922,79.705 85.115,79.705 ; v1(74.93,93.066) 84.785,102.921 132.232,102.921 v1(135.052,100.101) ; v1(83.922,80.899) 85.115,79.705 ; U1.14 86.35,79.705 85.115,79.705 ; J3.10 131.369,84.529 v1(131.369,85.7)
  Bottom Layer w0.3: v1(74.93,93.066) 85.306,82.69 85.674,82.69 87.363,81.001 88.9,81.001 89.535,80.366 89.535,78.588 88.9,77.953 86.868,77.953 v1(83.922,80.899) ; v1(131.369,85.7) 135.052,89.383 v1(135.052,100.101)
GPIO_27: J2.27 J3.11 U1.15 | length 188.8
  Top Layer w0.3: J2.27 62.15,61.53 62.15,70.872 63.195,71.918 63.195,80.328 63.665,80.797 67.963,80.797 68.242,81.077 68.242,84.549 68.656,84.963 82.878,84.963 85.85,81.991 U1.15 ; v1(123.012,95.555) 122.377,94.92 122.377,90.653 123.85,89.179 123.85,82.23 J3.11
  Bottom Layer w0.3: J2.27 63.302,59.22 53.619,68.903 53.619,94.965 61.143,102.489 121.463,102.489 123.012,100.94 v1(123.012,95.555)
GPIO_28: J2.28 J3.12 U1.16 | length 196.7
  Top Layer w0.3: v1(63.449,57.937) 64.934,57.937 65.747,58.75 67,58.75 J2.28 67,60.004 65.758,61.246 65.758,62.274 66.491,63.008 69.675,63.008 70.172,63.504 70.172,65.219 69.5,65.891 69.5,78 74.5,83 83.25,83 U1.16
  Bottom Layer w0.3: v1(63.449,57.937) 60.935,60.452 55.474,60.452 51.638,64.287 51.638,97.257 58.293,103.911 124.46,103.911 130.302,98.069 130.302,80.922 J3.12
GPIO_29: J2.29 J3.13 U1.17 | length 216.3
  Top Layer w0.3: J2.29 65.738,57.958 68.377,57.958 72.115,61.696 72.115,76.184 77.752,81.822 81.135,81.822 81.135,80.365 82.65,78.85 U1.17 ; J3.13 123.342,80.198 123.342,85.384 121.945,86.781 121.945,96.393 129.388,96.622 v1(131.724,94.285)
  Bottom Layer w0.3: J2.29 56.96,56.68 51.206,62.433 51.206,104.064 51.714,104.572 125.273,104.572 131.724,98.12 v1(131.724,94.285)
GPIO_31: J2.31 J3.15 U1.20 | length 107.5
  Top Layer w0.3: v1(68.5,68) 68.669,72.791 68.669,78.669 v1(74,84) ; U1.20 84.43,77.35 v1(85.065,76.715) ; v1(122.504,83.845) 122.504,78.496 J3.15
  Bottom Layer w0.2: 65.743,55.383 67.445,55.383 67.674,55.611 ccw(c67,56.64) 68.029,55.966
  Bottom Layer w0.3: J2.31 64.46,54.1 65.743,55.383 ; 67.674,55.611 68.5,56.437 v1(68.5,68) ; v1(74,84) 77.78,84 v1(85.065,76.715) 86.355,75.425 89.04,75.425 89.7,74.765 94.526,74.765 97.121,72.17 98.243,72.17 101.723,75.65 101.723,77.229 108.339,83.845 v1(122.504,83.845)
GPIO_32: J2.32 J3.16 U1.21 | length 185.6
  Top Layer w0.3: v1(63.398,52.857) 65.24,52.857 65.71,52.387 65.71,50.648 66.04,50.317 67.767,50.317 68.25,50.8 68.25,52.89 J2.32 72.606,59.746 72.606,75.781 76.327,79.502 77.47,79.502 78.867,78.105 78.867,77.38 79.319,76.928 81.373,76.928 81.452,76.85 U1.21
  Bottom Layer w0.3: v1(63.398,52.857) 60.892,50.351 60.892,34.688 63.094,32.487 132.588,32.487 134.391,34.29 134.391,69.149 J3.16
GPIO_33: J2.33 J3.18 U1.22 | length 167.4
  Top Layer w0.3: v1(80.543,76.098) 80.795,76.35 U1.22 ; v1(86.589,55.143) 86.589,63.322 v1(86.817,63.551)
  Bottom Layer w0.3: J2.33 63.17,50.31 63.17,43.104 63.576,42.697 ; v1(80.543,76.098) 80.543,69.825 v1(86.817,63.551) ; v1(86.589,55.143) 86.424,55.143 78.948,47.668 72.915,47.668 67.945,42.697 63.576,42.697 ; J3.18 132.715,68.285 132.715,43.18 129.166,39.631 118.702,39.631 116.869,41.464 105.727,41.464 104.988,40.724 103.294,40.724 103.234,40.784 70.486,40.784 70.147,40.445 65.829,40.445 63.576,42.697
GPIO_35: J2.35 J3.19 U1.23 | length 151.2
  Top Layer w0.3: J2.35 63.195,47.795 63.195,42.647 64.813,41.029 67.902,41.029 68.487,40.445 70.147,40.445 70.147,42.327 ; v1(72.898,39.954) 72.898,43.18 72.568,43.51 71.33,43.51 ; U1.23 87.654,75.85 89.006,74.498 89.006,73.284 89.146,73.144 89.146,71.755 88.402,71.011 84.705,71.011 82.58,68.887 75.472,68.887 74.53,67.945 74.53,46.71 71.33,43.51 ; v1(106.07,40.615) 106.909,41.453 109.677,41.453 110.693,42.469 110.693,52.578 112.395,54.28 112.725,54.28 113.665,55.22 118.085,55.22 119.355,56.49 119.355,62.355 J3.19 ; 70.147,42.327 71.33,43.51 ; 70.147,42.327 70.147,42.537 71.12,43.51 71.33,43.51
  Bottom Layer w0.3: v1(72.898,39.954) 74.303,39.954 74.651,40.302 102.802,40.302 102.807,40.297 105.753,40.297 v1(106.07,40.615)
GPIO_36: J2.36 J3.21 U1.41 | length 104.7
  Top Layer w0.3: v1(88.976,59.563) 89.052,59.487 v1(89.052,55.143) ; v1(88.976,60.96) 89.35,61.334 U1.41 ; v1(111.531,52.172) 113.884,54.524 118.786,54.524 120.752,56.49 120.752,61.212 J3.21
  Bottom Layer w0.3: J2.36 74.435,49.06 74.932,48.563 76.579,48.563 ; v1(88.976,59.563) 88.231,59.563 77.231,48.563 76.579,48.563 ; v1(88.976,60.96) 76.579,48.563 ; v1(89.052,55.143) 106.308,55.143 109.28,52.172 v1(111.531,52.172)
GPIO_37: J2.37 J3.22 U1.28 | length 145.9
  Top Layer w0.3: v1(75.844,39.472) v1(75.844,49.403) ; U1.28 84.831,73.35 v1(84.988,73.508) ; J3.22 133.553,62.367 v1(133.553,51.308)
  Bottom Layer w0.2: 65.778,48.881 cw(c67.385,49.064) 66.37,50.323 65.778,47.798
  Bottom Layer w0.3: J2.37 64.46,46.48 65.778,47.798 ; 66.37,50.323 67.677,50.323 68,50 76.804,50.363 ; v1(75.844,39.472) 76.194,39.821 88.414,39.821 88.764,39.472 114.809,39.472 115.151,39.814 117.665,39.814 118.3,39.179 131.178,39.179 133.553,41.554 v1(133.553,51.308) ; v1(75.844,49.403) 76.804,50.363 ; v1(84.988,73.508) 84.988,68.081 88.653,64.417 88.653,62.211 76.804,50.363
GPIO_38: J2.38 J3.23 U1.27 | length 131
  Top Layer w0.3: v1(67.843,41.859) 67.079,41.859 65.758,43.18 65.758,44.495 66.811,45.547 J2.38 73.033,52.553 73.033,75.394 74.639,77 77.423,77 80.573,73.85 U1.27 ; v1(104.064,41.554) 104.064,40.945 105.232,39.776 110.49,39.776 112.471,41.758 112.471,52.273 114.097,53.899 120.249,53.899 124.155,57.805 124.155,62.075 J3.23
  Bottom Layer w0.3: v1(67.843,41.859) 68.255,42.27 69.947,42.27 70.383,41.834 77.978,41.834 80.264,44.12 95.885,44.12 98.45,41.554 v1(104.064,41.554)
GPIO_40: J2.40 J3.24 U1.26 | length 106.7
  Top Layer w0.3: U1.26 85.688,74.35 86.947,73.092 v1(87.135,72.268) ; v1(115.976,49.022) 122.453,55.499 127,55.499 127.711,56.21 127.711,60.02 128.27,60.579 129.54,60.579 130.251,61.29 130.251,63.129 J3.24
  Bottom Layer w0.3: J2.40 71.115,48.095 78.069,48.095 86.042,56.068 88.618,56.068 ; v1(87.135,72.268) 91.914,67.489 91.914,59.365 88.618,56.068 ; v1(115.976,49.022) 111.666,53.333 110.514,53.333 107.778,56.068 88.618,56.068
LED_1: D1.A U1.57 | length 35.9
  Top Layer w0.3: v1(91.262,76.657) 92.12,75.35 U1.57 ; v1(101.879,87.732) 103.294,87.732 111.219,95.656 112.55,95.656 D1.A
  Bottom Layer w0.3: v1(91.262,76.657) 94.259,76.657 101.506,83.904 101.506,87.358 v1(101.879,87.732)
LED_2: D2.A U1.58 | length 34.5
  Top Layer w0.3: U1.58 96.215,75.85 97.008,75.057 101.498,75.057 101.956,74.6 110.49,74.6 111.76,75.87 111.76,90.5 112.395,91.135 112.55,91.135 D2.A
LED_3: D3.A U1.59 | length 42.7
  Top Layer w0.3: v1(92.092,77.495) 93.238,76.35 U1.59 ; D3.A 112.55,89.969 v1(112.598,90.018)
  Bottom Layer w0.3: v1(92.092,77.495) 95.643,81.047 95.643,84.01 103.149,91.516 103.149,94.932 103.493,95.276 104.482,95.276 104.826,94.932 104.826,93.26 104.038,92.472 104.038,90.754 104.775,90.018 v1(112.598,90.018)
LED_4: D4.A U1.61 | length 35.1
  Top Layer w0.3: v1(89.713,76.937) 91.11,78.334 92.717,78.334 93.701,77.35 U1.61 ; D4.A 112.55,85.016 v1(112.827,85.293)
  Bottom Layer w0.3: v1(89.713,76.937) 90.83,75.819 98.069,75.819 107.544,85.293 v1(112.827,85.293)
LED_5: D5.A U1.62 | length 21.5
  Top Layer w0.3: U1.62 96.369,77.85 97.942,76.276 v1(102.692,76.276) ; D5.A 112.55,77.798 v1(112.725,77.622)
  Bottom Layer w0.3: v1(102.692,76.276) 111.379,76.276 v1(112.725,77.622)
LED_6: D6.A U1.29 | length 37
  Top Layer w0.3: U1.29 84.379,72.85 85.79,71.438 87.935,71.438 87.935,71.933 v1(88.316,72.314) ; v1(112.547,71.323) 112.55,71.326 D6.A
  Bottom Layer w0.3: v1(88.316,72.314) 88.57,72.568 91.288,72.568 92.223,73.503 92.223,73.787 93.32,73.787 95.809,71.298 99.085,71.298 99.136,71.349 112.522,71.349 v1(112.547,71.323)
LED_PWR_K: D7.K R12.2 | length 3
  Top Layer w0.3: R12.2 D7.K
MCU_BOOT: R9.2 U1.60 | length 10.7
  Top Layer w0.3: U1.60 96.65,76.85 97.95,75.55 101.741,75.55 101.863,75.428 103.401,75.428 103.523,75.55 R9.2
MCU_JTDI: J1.4 U1.50 | length 25.8
  Top Layer w0.3: U1.50 100.762,71.85 110.882,61.73 J1.4
MCU_NRST: C4.2 R5.1 U1.7 | length 24.2
  Top Layer w0.3: U1.7 89.85,80.01 90.485,79.375 95.275,79.375 97.63,81.73 97.63,89.524 97.5,89.654 C4.2 97.65,91.357 99.893,93.6 100.65,93.6 R5.1
MCU_OSC_IN: C1.1 U1.5 X1.1 | length 11.2
  Top Layer w0.3: X1.1 88.95,89.871 89.443,89.378 C1.1 89.443,87.15 90.85,85.743 U1.5
MCU_OSC_OUT: R3.1 U1.6 | length 14.1
  Top Layer w0.3: R3.1 87.028,89.55 88.3,88.278 88.3,86 90.35,83.95 U1.6
MCU_PIN_1: J4.1 U1.33 | length 9.9
  Top Layer w0.3: J4.1 83.364,67.08 85.35,69.065 U1.33
MCU_PIN_2: J4.2 U1.34 | length 11.9
  Top Layer w0.3: J4.2 82.04,64.54 85.85,68.35 U1.34
MCU_PIN_3: J4.3 U1.35 | length 13.7
  Top Layer w0.3: J4.3 80.49,62 86.35,67.86 U1.35
MCU_PIN_4: J4.4 U1.36 | length 15.9
  Top Layer w0.3: J4.4 79.46,59.46 86.85,66.85 U1.36
MCU_PIN_5: J4.5 U1.37 | length 17.8
  Top Layer w0.3: J4.5 78.066,56.92 87.35,66.204 U1.37
MCU_PIN_6: J4.6 U1.38 | length 19.6
  Top Layer w0.3: J4.6 85.763,63.817 87.85,65.905 U1.38
MCU_SWCLK: J1.5 U1.49 | length 26.6
  Top Layer w0.3: U1.49 96.389,71.35 107.753,59.985 115.705,59.985 J1.5
MCU_SWDIO: J1.6 U1.46 | length 31.5
  Top Layer w0.3: U1.46 91.85,70.434 93.802,70.434 105.943,58.293 114.857,58.293 J1.6
MCU_SWITCH_1: R1.2 SW1.1 U1.42 | length 31.6
  Top Layer w0.3: SW1.1 R1.2 83.363,50.55 84.476,51.664 88.494,51.664 89.892,53.062 89.892,59.116 89.815,59.193 89.815,61.706 89.85,61.742 U1.42
MCU_SWITCH_2: R2.2 SW2.1 U1.43 | length 26.8
  Top Layer w0.3: SW2.1 R2.2 88.55,50.55 90.704,52.704 90.704,59.081 90.242,59.543 90.242,61.203 90.35,61.312 U1.43
MCU_SWO: J1.3 U1.55 | length 25.8
  Top Layer w0.3: U1.55 100.782,74.35 110.862,64.27 J1.3
NetC3_2: C3.2 U1.30 | length 9.5
  Top Layer w0.3: C3.2 77.994,75.143 80.787,72.35 U1.30
NetD1_K: D1.K R4.2 | length 4.1
  Top Layer w0.5: D1.K R4.2
NetD2_K: D2.K R6.2 | length 4.1
  Top Layer w0.5: D2.K R6.2
NetD3_K: D3.K R7.2 | length 4.1
  Top Layer w0.5: D3.K R7.2
NetD4_K: D4.K R8.2 | length 4.1
  Top Layer w0.5: D4.K R8.2
NetD5_K: D5.K R10.2 | length 4
  Top Layer w0.5: D5.K R10.2
NetD6_K: D6.K R11.2 | length 4.1
  Top Layer w0.5: D6.K R11.2
USB_D_N: J5.2 U1.44 | length 35.6
  Top Layer w0.235: J5.2 90.807,34.707 90.807,50.923 91.565,51.68 91.565,59.258 91.882,59.576 91.882,60.854 91.565,61.171 91.565,67.762 90.862,68.464 90.862,69.288 U1.44
USB_D_P: J5.3 U1.45 | length 35.5
  Top Layer w0.235: J5.3 91.243,34.707 91.243,50.743 92,51.5 92,58.969 92.244,59.213 92.244,67.698 91.362,68.58 91.362,69.288 U1.45
VBUS: C12.2 FB1.1 J5.1 | length 16
  Top Layer w0.3: J5.1 90.05,33.629 90.36,33.32 99.173,33.32 100.143,34.29 C12.2 100.55,35.093 FB1.1
XTAL_IN: C2.1 R3.2 X1.3 | length 7.2
  Top Layer w0.3: R3.2 C2.1 83.15,94.357 83.857,93.65 X1.3
pads on no net: J2.2 J2.4 J3.2 J3.4 J5.4 J5.6 J5.7 J5.8 J5.9 J5.10 J5.11

## Silkscreen, mask and mechanical layers (free items; w line width, h text height)
Mechanical 1:
  the board outline again, w0.254

## Text inside footprints (layer, text, board x,y; h text height)
D1: Mechanical 13 "+" at 111.733,95 h1 r180
D2: Mechanical 13 "+" at 111.733,91 h1 r180
D3: Mechanical 13 "+" at 111.733,87 h1 r180
D4: Mechanical 13 "+" at 111.733,83 h1 r180
D5: Mechanical 13 "+" at 111.733,79 h1 r180
D6: Mechanical 13 "+" at 111.733,75 h1 r180
D7: Mechanical 13 "+" at 92.5,48.217 h1 r90